# Altium PCB 16Ch_Milti_INA219.PcbDoc
Units mil, origin at the board's own origin, x right, y up, seen from the top; angles counter-clockwise.
Board outline 2153.54 x 7365 mil, 2 copper layers (Top Layer, Bottom Layer); 84 components, 68 nets, 338 pads, 58 vias.
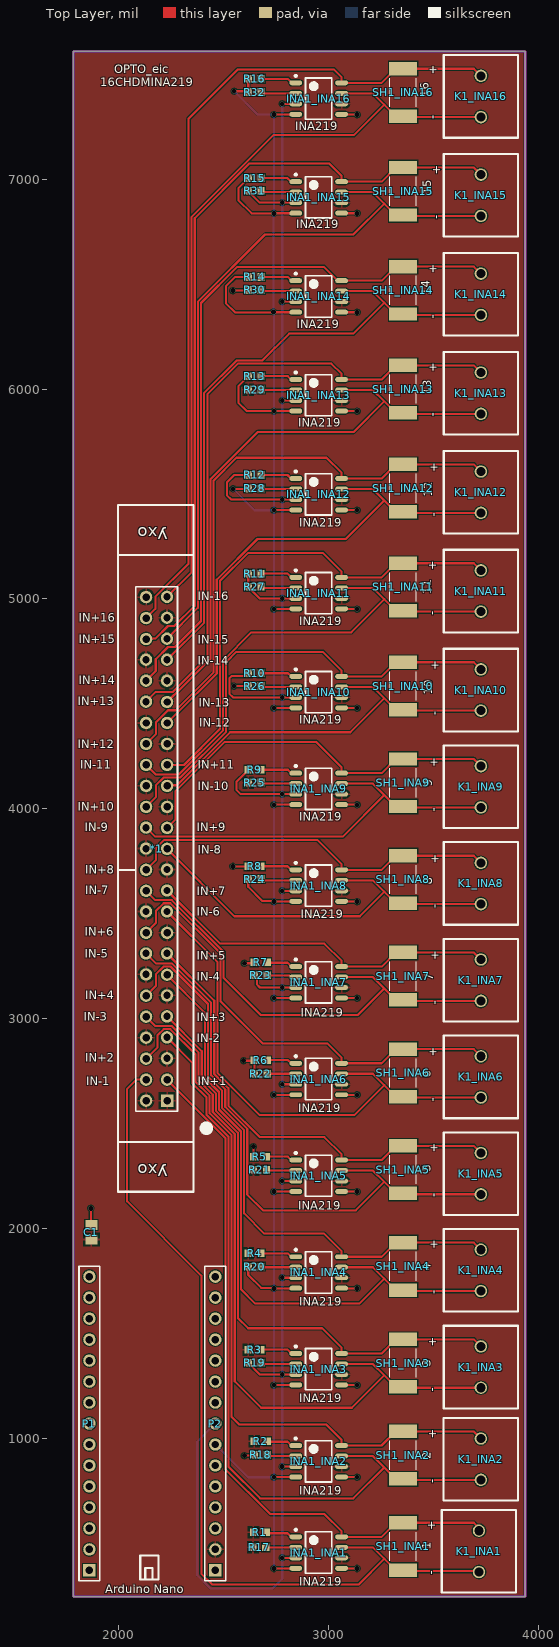
[diagram p0: Top Layer view]
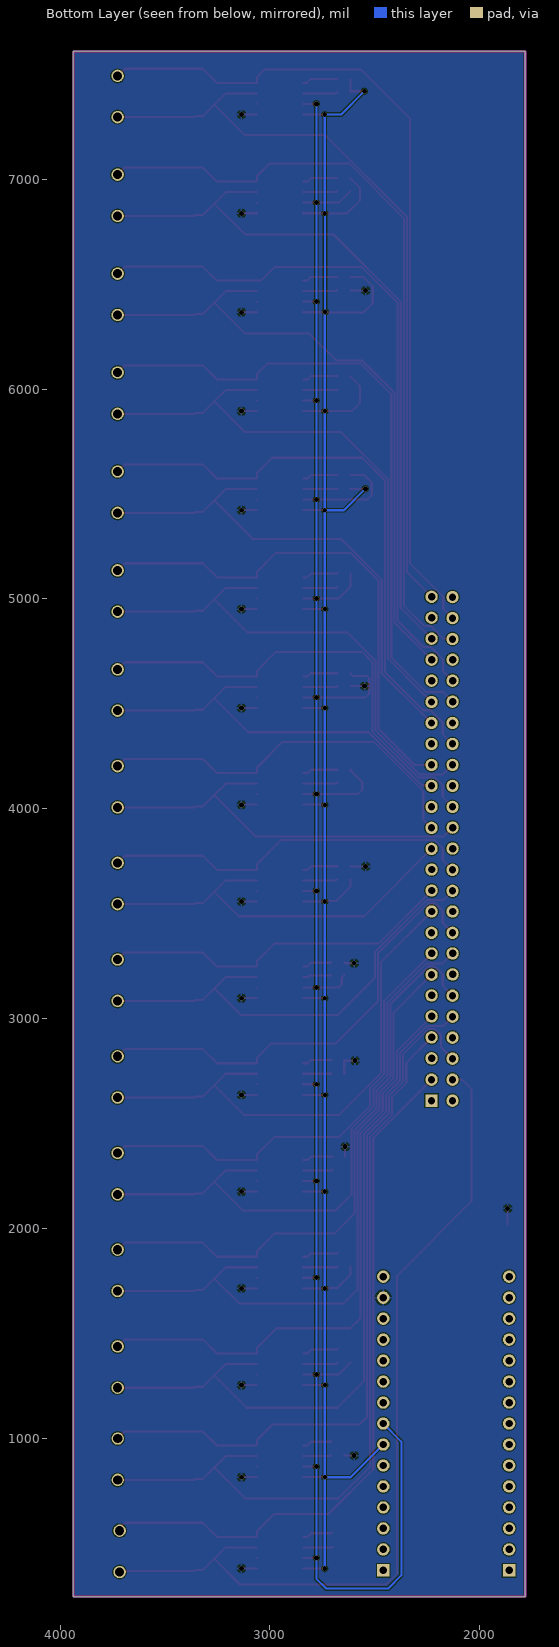
[diagram p1: Bottom Layer view, seen from below]
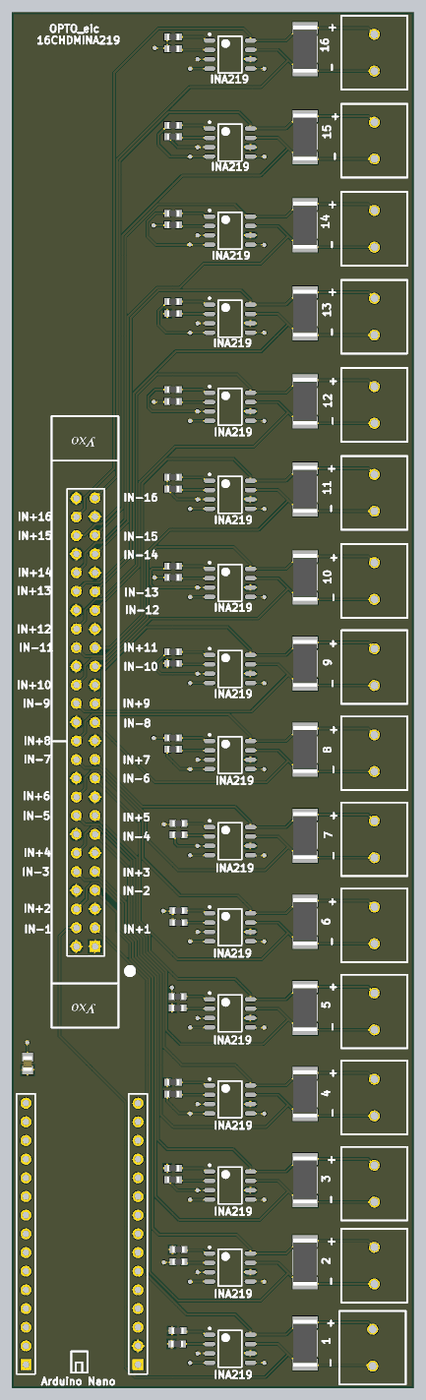
[diagram p2: 3D render of the assembled board from above, using the file's embedded part models]

## Layer stack, top to bottom
Top Solder: solder mask 0.4, Solder Resist, Dk 3.5
Top Layer: signal copper 1.4
Dielectric 1: dielectric 12.6, FR-4, Dk 4.8
Bottom Layer: signal copper 1.4
Bottom Solder: solder mask 0.4, Solder Resist, Dk 3.5

## Board outline
1783.46,245 1783.46,7610 3937.01,7610 3937.01,245

## Design rules (kind name [scope] priority, off if disabled: settings)
BoardOutlineClearance [OnLayer('Multi-Layer')] p1: gap=10 ignorepadtopadclearanceinfootprint=FALSE except(0: Arc-SplitContinuation Track-SplitContinuation SMDPad-SplitContinuation THPad-SplitContinuation Via-SplitContinuation Fill-SplitContinuation Poly-SplitContinuation Region-SplitContinuation Text-SplitContinuation; 15.75: Arc-OutlineEdge Track-OutlineEdge SMDPad-OutlineEdge THPad-OutlineEdge Via-OutlineEdge Fill-OutlineEdge Poly-OutlineEdge Region-OutlineEdge Text-OutlineEdge)
Clearance [All] p1: gap=4.92 ignorepadtopadclearanceinfootprint=TRUE
DiffPairsRouting [All] p1: maxlimit=10 minlimit=5 mostfreqgap=5.12 toplayer_minwidth=5 toplayer_maxwidth=15 toplayer_prefwidth=14.57 bottomlayer_minwidth=5 bottomlayer_maxwidth=15 bottomlayer_prefwidth=14.57 maxuncoupledlength=500
HoleSize [All] p1: absolutevalues=TRUE maxlimit=196.85 minlimit=11.81 maxpercent=80.000 minpercent=20.000
MinimumSolderMaskSliver [All] p1: minsoldermaskwidth=3.94
PlaneClearance [All] p1: clearance=39.37
PolygonConnect [All] p1: connectstyle=Relief reliefconductorwidth=10 reliefentries=4 polygonreliefangle="90 Angle" airgapwidth=10
RoomDefinition INA1 [InComponentClass('INA1')] p1 off: confinementstyle=ConfineIn formatcopy=TRUE lockcomponents=FALSE outline 2661,251.97 3908.75,251.97 3908.75,669.29 2661,669.29
RoomDefinition INA10 [InComponentClass('INA10')] p2 off: confinementstyle=ConfineIn formatcopy=TRUE lockcomponents=FALSE outline 2661,4363 3908.75,4363 3908.75,4768 2661,4768
RoomDefinition INA3 [InComponentClass('INA3')] p3 off: confinementstyle=ConfineIn formatcopy=TRUE lockcomponents=FALSE outline 2661,1136 3908.75,1136 3908.75,1541 2661,1541
RoomDefinition INA6 [InComponentClass('INA6')] p4 off: confinementstyle=ConfineIn formatcopy=TRUE lockcomponents=FALSE outline 2661,2519 3908.75,2519 3908.75,2924 2661,2924
RoomDefinition INA11 [InComponentClass('INA11')] p5 off: confinementstyle=ConfineIn formatcopy=TRUE lockcomponents=FALSE outline 2661,4835 3908.75,4835 3908.75,5240 2661,5240
RoomDefinition INA9 [InComponentClass('INA9')] p6 off: confinementstyle=ConfineIn formatcopy=TRUE lockcomponents=FALSE outline 2661,3902 3908.75,3902 3908.75,4307 2661,4307
RoomDefinition INA13 [InComponentClass('INA13')] p7 off: confinementstyle=ConfineIn formatcopy=TRUE lockcomponents=FALSE outline 2661,5778 3908.75,5778 3908.75,6183 2661,6183
RoomDefinition INA16 [InComponentClass('INA16')] p8 off: confinementstyle=ConfineIn formatcopy=TRUE lockcomponents=FALSE outline 2661,7192 3908.75,7192 3908.75,7597 2661,7597
RoomDefinition INA15 [InComponentClass('INA15')] p9 off: confinementstyle=ConfineIn formatcopy=TRUE lockcomponents=FALSE outline 2661,6721 3908.75,6721 3908.75,7126 2661,7126
RoomDefinition INA14 [InComponentClass('INA14')] p10 off: confinementstyle=ConfineIn formatcopy=TRUE lockcomponents=FALSE outline 2661,6249 3908.75,6249 3908.75,6654 2661,6654
RoomDefinition INA12 [InComponentClass('INA12')] p11 off: confinementstyle=ConfineIn formatcopy=TRUE lockcomponents=FALSE outline 2661,5306 3908.75,5306 3908.75,5711 2661,5711
RoomDefinition INA8 [InComponentClass('INA8')] p12 off: confinementstyle=ConfineIn formatcopy=TRUE lockcomponents=FALSE outline 2661,3441 3908.75,3441 3908.75,3846 2661,3846
RoomDefinition INA7 [InComponentClass('INA7')] p13 off: confinementstyle=ConfineIn formatcopy=TRUE lockcomponents=FALSE outline 2661,2980 3908.75,2980 3908.75,3385 2661,3385
RoomDefinition INA5 [InComponentClass('INA5')] p14 off: confinementstyle=ConfineIn formatcopy=TRUE lockcomponents=FALSE outline 2661,2058 3908.75,2058 3908.75,2463 2661,2463
RoomDefinition INA4 [InComponentClass('INA4')] p15 off: confinementstyle=ConfineIn formatcopy=TRUE lockcomponents=FALSE outline 2661,1597 3908.75,1597 3908.75,2002 2661,2002
RoomDefinition INA2 [InComponentClass('INA2')] p16 off: confinementstyle=ConfineIn formatcopy=TRUE lockcomponents=FALSE outline 2660.75,697 3908.5,697 3908.5,1102 2660.75,1102
RoutingVias [All] p1: holewidth=11.81 width=50 viastyle="Through Hole" minholewidth=11.81 minwidth=23.62 maxholewidth=28 maxwidth=50
SilkToSilkClearance [All] p1: silktosilkclearance=0
SilkToSolderMaskClearance [IsPad] p1: minsilkscreentomaskgap=0 clearancetoexposedcopper=TRUE
SolderMaskExpansion [All] p1: expansion=4 istentingtop=FALSE
UnRoutedNet [All] p1: checkbadconnections=TRUE
Width [All] p1: maxlimit=98.43 minlimit=4.92 preferedwidth=10 minimp=50.000000 maximp=50.000000 favimp=50.000000
23 further rules are at their usual default settings.

## Classes and differential pairs
channel class INA219-surrounding: INA1 INA2 INA3 INA4 INA5 INA6 INA7 INA8 INA9 INA10 INA11 INA12 INA13 INA14 INA15 INA16
component class INA16: INA1_INA16 K1_INA16 SH1_INA16
component class INA15: INA1_INA15 K1_INA15 SH1_INA15
component class INA14: INA1_INA14 K1_INA14 SH1_INA14
component class INA13: INA1_INA13 K1_INA13 SH1_INA13
component class INA12: INA1_INA12 K1_INA12 SH1_INA12
component class INA11: INA1_INA11 K1_INA11 SH1_INA11
component class INA10: INA1_INA10 K1_INA10 SH1_INA10
component class INA9: INA1_INA9 K1_INA9 SH1_INA9
component class INA8: INA1_INA8 K1_INA8 SH1_INA8
component class INA7: INA1_INA7 K1_INA7 SH1_INA7
component class INA6: INA1_INA6 K1_INA6 SH1_INA6
component class INA5: INA1_INA5 K1_INA5 SH1_INA5
component class INA4: INA1_INA4 K1_INA4 SH1_INA4
component class INA3: INA1_INA3 K1_INA3 SH1_INA3
component class INA2: INA1_INA2 K1_INA2 SH1_INA2
component class INA1: INA1_INA1 K1_INA1 SH1_INA1
net class IN+[1..16]: IN+1 IN+2 IN+3 IN+4 IN+5 IN+6 IN+7 IN+8 IN+9 IN+10 IN+11 IN+12 IN+13 IN+14 IN+15 IN+16
net class IN-[1..16]: IN-1 IN-2 IN-3 IN-4 IN-5 IN-6 IN-7 IN-8 IN-9 IN-10 IN-11 IN-12 IN-13 IN-14 IN-15 IN-16
net class A1[1..16]: A11 A12 A13 A14 A15 A16 A17 A18 A19 A110 A111 A112 A113 A114 A115 A116
net class A0[1..16]: A01 A02 A03 A04 A05 A06 A07 A08 A09 A010 A011 A012 A013 A014 A015 A016
component class 16Ch_Milti_INA219: *1 P2 q R1 R2 R3 R4 R5 R6 R7 R8 R9 R10 R11 R12 R13 R14 R15 R16 R17 R18 R19 R20 R21 R22 R23 R24 R25 R26 R27 R28 R29 R30 R31 R32 С1

## Components (designator, comment, footprint, x,y, rotation, side; value= is the part's Value field where it differs from the comment)
*1 "IDC50" IDC50 2206.56,3960.37 r90 top locked
INA1_INA1 "INA219" INA219 2952.75,455 r0 top (schematic designator INA1)
INA1_INA2 "INA219" INA219 2952.5,890 r0 top (schematic designator INA1)
INA1_INA3 "INA219" INA219 2952.75,1329 r0 top (schematic designator INA1)
INA1_INA4 "INA219" INA219 2952.75,1790 r0 top (schematic designator INA1)
INA1_INA5 "INA219" INA219 2952.75,2251 r0 top (schematic designator INA1)
INA1_INA6 "INA219" INA219 2952.75,2712 r0 top (schematic designator INA1)
INA1_INA7 "INA219" INA219 2952.75,3173 r0 top (schematic designator INA1)
INA1_INA8 "INA219" INA219 2952.75,3634 r0 top (schematic designator INA1)
INA1_INA9 "INA219" INA219 2952.75,4095 r0 top (schematic designator INA1)
INA1_INA10 "INA219" INA219 2952.75,4556 r0 top (schematic designator INA1)
INA1_INA11 "INA219" INA219 2952.75,5028 r0 top (schematic designator INA1)
INA1_INA12 "INA219" INA219 2952.75,5499 r0 top (schematic designator INA1)
INA1_INA13 "INA219" INA219 2952.75,5971 r0 top (schematic designator INA1)
INA1_INA14 "INA219" INA219 2952.75,6442 r0 top (schematic designator INA1)
INA1_INA15 "INA219" INA219 2952.75,6914 r0 top (schematic designator INA1)
INA1_INA16 "INA219" INA219 2952.75,7385 r0 top (schematic designator INA1)
K1_INA1 "KLEMMNIK-2" KLEMMNIK-2 3716.54,460.63 r270 top (schematic designator K1)
K1_INA2 "KLEMMNIK-2" KLEMMNIK-2 3725.5,900 r270 top (schematic designator K1)
K1_INA3 "KLEMMNIK-2" KLEMMNIK-2 3725.75,1339 r270 top (schematic designator K1)
K1_INA4 "KLEMMNIK-2" KLEMMNIK-2 3725.75,1800 r270 top (schematic designator K1)
K1_INA5 "KLEMMNIK-2" KLEMMNIK-2 3725.75,2261 r270 top (schematic designator K1)
K1_INA6 "KLEMMNIK-2" KLEMMNIK-2 3725.75,2722 r270 top (schematic designator K1)
K1_INA7 "KLEMMNIK-2" KLEMMNIK-2 3725.75,3183 r270 top (schematic designator K1)
K1_INA8 "KLEMMNIK-2" KLEMMNIK-2 3725.75,3644 r270 top (schematic designator K1)
K1_INA9 "KLEMMNIK-2" KLEMMNIK-2 3725.75,4105 r270 top (schematic designator K1)
K1_INA10 "KLEMMNIK-2" KLEMMNIK-2 3725.75,4566 r270 top (schematic designator K1)
K1_INA11 "KLEMMNIK-2" KLEMMNIK-2 3725.75,5038 r270 top (schematic designator K1)
K1_INA12 "KLEMMNIK-2" KLEMMNIK-2 3725.75,5509 r270 top (schematic designator K1)
K1_INA13 "KLEMMNIK-2" KLEMMNIK-2 3725.75,5981 r270 top (schematic designator K1)
K1_INA14 "KLEMMNIK-2" KLEMMNIK-2 3725.75,6452 r270 top (schematic designator K1)
K1_INA15 "KLEMMNIK-2" KLEMMNIK-2 3725.75,6924 r270 top (schematic designator K1)
K1_INA16 "KLEMMNIK-2" KLEMMNIK-2 3725.75,7395 r270 top (schematic designator K1)
P1 "Header 15" HDR1X15 1860,370 r90 top
P2 "Header 15" HDR1X15 2460,370 r90 top
R1 "RES0603" RES0603 2459.75,444.2 r180 top
R2 "RES0603" RES0603 2463.83,878.7 r180 top
R3 "RES0603" RES0603 2435.02,1315.01 r180 top
R4 "RES0603" RES0603 2435.02,1774.01 r180 top
R5 "RES0603" RES0603 2459.9,2234.5 r180 top
R6 "RES0603" RES0603 2463.83,2693.87 r180 top
R7 "RES0603" RES0603 2463.83,3161.24 r180 top
R8 "RES0603" RES0603 2435.02,3619.01 r180 top
R9 "RES0603" RES0603 2435.02,4079.01 r180 top
R10 "RES0603" RES0603 2435.02,4539.01 r180 top
R11 "RES0603" RES0603 2435.02,5014.01 r180 top
R12 "RES0603" RES0603 2435.02,5484.01 r180 top
R13 "RES0603" RES0603 2435.02,5955.01 r180 top
R14 "RES0603" RES0603 2435.02,6428.01 r180 top
R15 "RES0603" RES0603 2435.02,6899.01 r180 top
R16 "RES0603" RES0603 2435.02,7372.01 r180 top
R17 "RES0603" RES0603 2457.39,373.33 r180 top
R18 "RES0603" RES0603 2463.83,813.7 r180 top
R19 "RES0603" RES0603 2435.02,1253.01 r180 top
R20 "RES0603" RES0603 2435.02,1711.01 r180 top
R21 "RES0603" RES0603 2459.9,2172.5 r180 top
R22 "RES0603" RES0603 2463.83,2629.87 r180 top
R23 "RES0603" RES0603 2463.83,3100.24 r180 top
R24 "RES0603" RES0603 2435.02,3558.01 r180 top
R25 "RES0603" RES0603 2435.02,4018.01 r180 top
R26 "RES0603" RES0603 2435.02,4478.01 r180 top
R27 "RES0603" RES0603 2435.02,4951.01 r180 top
R28 "RES0603" RES0603 2435.02,5420.01 r180 top
R29 "RES0603" RES0603 2435.02,5891.01 r180 top
R30 "RES0603" RES0603 2435.02,6366.01 r180 top
R31 "RES0603" RES0603 2435.02,6838.01 r180 top
R32 "RES0603" RES0603 2435.02,7309.01 r180 top
SH1_INA1 "RES2512" RES2512 3354.75,474 r270 top (schematic designator SH1)
SH1_INA2 "RES2512" RES2512 3354.5,909 r270 top (schematic designator SH1)
SH1_INA3 "RES2512" RES2512 3354.75,1348 r270 top (schematic designator SH1)
SH1_INA4 "RES2512" RES2512 3354.75,1809 r270 top (schematic designator SH1)
SH1_INA5 "RES2512" RES2512 3354.75,2270 r270 top (schematic designator SH1)
SH1_INA6 "RES2512" RES2512 3354.75,2731 r270 top (schematic designator SH1)
SH1_INA7 "RES2512" RES2512 3354.75,3192 r270 top (schematic designator SH1)
SH1_INA8 "RES2512" RES2512 3354.75,3653 r270 top (schematic designator SH1)
SH1_INA9 "RES2512" RES2512 3354.75,4114 r270 top (schematic designator SH1)
SH1_INA10 "RES2512" RES2512 3354.75,4575 r270 top (schematic designator SH1)
SH1_INA11 "RES2512" RES2512 3354.75,5047 r270 top (schematic designator SH1)
SH1_INA12 "RES2512" RES2512 3354.75,5518 r270 top (schematic designator SH1)
SH1_INA13 "RES2512" RES2512 3354.75,5990 r270 top (schematic designator SH1)
SH1_INA14 "RES2512" RES2512 3354.75,6461 r270 top (schematic designator SH1)
SH1_INA15 "RES2512" RES2512 3354.75,6933 r270 top (schematic designator SH1)
SH1_INA16 "RES2512" RES2512 3354.75,7404 r270 top (schematic designator SH1)
С1 "CAP0805" CAP0805 1870.08,1984.25 r90 top

## Footprints (in the part's own frame and the unit in brackets; to place one, negate y for a bottom-side part, rotate by r counter-clockwise, add the part's x,y. Pads: shape width x height; smd on the part's side, far side on the other; paste and mask are expansions set on the pad)
CAP0805 [mm]
  rect 1.16x1.47 smd: 1(-0.946,0.022) 2(0.814,0.022)
  body extent -1.07,-0.6 0.94,0.65, height 0.94
HDR1X15 [mm] "Connector; Header; 15 Position"
  rect 1.5x1.5 hole 0.9: 1(0,0)
  round 1.5 hole 0.9: 2(2.54,0) 3(5.08,0) 4(7.62,0) 5(10.16,0) 6(12.7,0) 7(15.24,0) 8(17.78,0) 9(20.32,0) 10(22.86,0) 11(25.4,0) 12(27.94,0) 13(30.48,0) 14(33.02,0) 15(35.56,0)
  silkscreen extent -1.27,-1.27 36.83,1.27
IDC50 [mm]
  rect 1.5x1.5 hole 0.9: 1(-34.325,-0.595)
  round 1.5 hole 0.9: 2(-34.325,1.945) 3(-31.785,-0.595) 4(-31.785,1.945) 5(-29.206,-0.588) 6(-29.245,1.945) 7(-26.666,-0.588) 8(-26.705,1.945) 9(-24.126,-0.588) 10(-24.165,1.945) 11(-21.586,-0.588) 12(-21.625,1.945) 13(-19.085,-0.595) 14(-19.046,1.952) 15(-16.506,-0.588) 16(-16.506,1.952) 17(-14.005,-0.595) 18(-14.005,1.945) 19(-11.426,-0.588) 20(-11.426,1.952) 21(-8.886,-0.588) 22(-8.925,1.945) 23(-6.346,-0.588) 24(-6.385,1.945) 25(-3.845,-0.595) 26(-3.806,1.952) 27(-1.305,-0.595) 28(-1.266,1.952) 29(1.235,-0.595) 30(1.235,1.945) 31(3.775,-0.595) 32(3.775,1.945) 33(6.315,-0.595) 34(6.315,1.945) 35(8.855,-0.595) 36(8.855,1.945) 37(11.395,-0.595) 38(11.395,1.945) 39(13.935,-0.595) 40(13.974,1.952) 41(16.514,-0.588) 42(16.514,1.952) 43(19.054,-0.588) 44(19.054,1.952) 45(21.594,-0.588) 46(21.555,1.945) 47(24.134,-0.588) 48(24.095,1.945) 49(26.674,-0.588) 50(26.635,1.945)
  silkscreen extent -45.35,-5.73 37.78,5.33
INA219 [mm] "SOIC, 8-Leads, Body 4,88x3,91mm, Pitch 1,27mm, IPC Medium Density"
  oval 1.55x0.6 smd: 1(-2.775,1.905) 2(-2.775,0.635) 3(-2.775,-0.635) 4(-2.775,-1.905) 5(2.775,-1.905) 6(2.775,-0.635) 7(2.775,0.635) 8(2.775,1.905)
  silkscreen extent -2.9,-2.5 1.6,2.88, body extent -2,-2.5 2,2.5, height 3.18
KLEMMNIK-2 [mm]
  round 1.5 hole 1.1: 1(-2.5,0) 2(2.5,0)
  silkscreen extent -5,-4.5 5,4.5
RES0603 [mm]
  rect 0.87x0.93 smd paste+0 mask+0.102: 1(-6.182,-2.717) 2(-4.622,-2.717)
  body extent -6.2,-3.12 -4.6,-2.32, height 0.55
RES2512 [mm]
  rect 1.62x3.4 smd: 1(-3.132,0.004) 2(2.614,0.004)
  silkscreen extent -2,-1.59 1.48,1.59, body extent -3.43,-1.6 2.92,1.6, height 0.65

## Part data
P1 P2: "Header, 15-Pin", LatestRevisionDate=17-Jul-2002, LatestRevisionNote="Re-released for DXP Platform.", Publisher="Altium Limited"

## Via types
v1: diameter 23.62, hole 23.62, Top Layer to Bottom Layer, 58 vias

## Nets (pads, with @x,y where several pads share a name; then routed paths per layer and width w, separated by ;. In a path a pad name is that pad's centre, name@x,y a point inside that pad or via, vN(x,y) a via of type N, cw(c..) or ccw(c..) an arc to the next point about the centre after c; other vN are vias at no path point)
3V: INA1_INA1.5 INA1_INA2.5 INA1_INA3.5 INA1_INA4.5 INA1_INA5.5 INA1_INA6.5 INA1_INA7.5 INA1_INA8.5 INA1_INA9.5 INA1_INA10.5 INA1_INA11.5 INA1_INA12.5 INA1_INA13.5 INA1_INA14.5 INA1_INA15.5 INA1_INA16.5 P2.14 R5.2 R6.2 R7.2 R8.2 R18.2 R22.2 R26.2 R30.2 С1.2 | length 1749
  Top Layer w10: v1(1867.08,2095.25) 1867.08,2018.45 С1.2 ; v1(2544,3725) 2616,3725 R8.2 ; v1(2544,6470) 2614,6470 R30.2 ; v1(2548.5,4585) R26.2 ; v1(2594.49,2799.21) 2644.17,2799.21 R6.2 R22.2 ; v1(2598.43,917.32) 2642.45,917.32 R18.2 ; v1(2598.43,3263.78) 2641.37,3263.78 R7.2 ; v1(2641.73,2389.76) 2641.73,2341.62 R5.2 ; INA1_INA2.5 3062.25,814.5 3135.25,814.5 v1(3135.75,814) ; INA1_INA1.5 3062.5,379.5 3135.5,379.5 v1(3136,379) ; INA1_INA3.5 3062.5,1253.5 3135.5,1253.5 v1(3136,1253) ; INA1_INA4.5 3062.5,1714.5 3135.5,1714.5 v1(3136,1714) ; INA1_INA5.5 3062.5,2175.5 3135.5,2175.5 v1(3136,2175) ; INA1_INA6.5 3062.5,2636.5 3135.5,2636.5 v1(3136,2636) ; INA1_INA7.5 3062.5,3097.5 3135.5,3097.5 v1(3136,3097) ; INA1_INA8.5 3062.5,3558.5 3135.5,3558.5 v1(3136,3558) ; INA1_INA9.5 3062.5,4019.5 3135.5,4019.5 v1(3136,4019) ; INA1_INA10.5 3062.5,4480.5 3135.5,4480.5 v1(3136,4480) ; INA1_INA11.5 3062.5,4952.5 3135.5,4952.5 v1(3136,4952) ; INA1_INA12.5 3062.5,5423.5 3135.5,5423.5 v1(3136,5423) ; INA1_INA13.5 3062.5,5895.5 3135.5,5895.5 v1(3136,5895) ; INA1_INA14.5 3062.5,6366.5 3135.5,6366.5 v1(3136,6366) ; INA1_INA15.5 3062.5,6838.5 3135.5,6838.5 v1(3136,6838) ; INA1_INA16.5 3062.5,7309.5 3135.5,7309.5 v1(3136,7309)
A01: INA1_INA1.2 R17.1 | length 143
  Top Layer w10: R17.1 2700.79,480 INA1_INA1.2
A02: INA1_INA2.2 R18.1 | length 138.4
  Top Layer w10: R18.1 2712.91,915 INA1_INA2.2
A03: INA1_INA3.2 R19.1 | length 167.6
  Top Layer w10: R19.1 2684.42,1354 INA1_INA3.2
A04: INA1_INA4.2 R20.1 | length 166.3
  Top Layer w10: R20.1 2681.42,1815 INA1_INA4.2
A05: INA1_INA5.2 R21.1 | length 141.6
  Top Layer w10: R21.1 2706.77,2276 INA1_INA5.2
A06: INA1_INA6.2 R22.1 | length 136.4
  Top Layer w10: R22.1 2707.23,2737 INA1_INA6.2
A07: INA1_INA7.2 R23.1 | length 140.1
  Top Layer w10: R23.1 2709.45,3205 2814.11,3205 2821.11,3198 INA1_INA7.2
A08: INA1_INA8.2 R24.1 | length 167.6
  Top Layer w10: R24.1 2684.42,3659 INA1_INA8.2
A09: INA1_INA9.2 R25.1 | length 167.1
  Top Layer w10: R25.1 2683.42,4120 INA1_INA9.2
A010: INA1_INA10.2 R26.1 | length 166.7
  Top Layer w10: R26.1 2682.42,4581 INA1_INA10.2
A11: INA1_INA1.1 R1.1 | length 149.1
  Top Layer w10: R1.1 2707.33,547 2804.11,547 2821.11,530 INA1_INA1.1
A011: INA1_INA11.2 R27.1 | length 167.1
  Top Layer w10: R27.1 2683.42,5053 INA1_INA11.2
A12: INA1_INA2.1 R2.1 | length 144.6
  Top Layer w10: R2.1 2709.91,983 2804.63,983 2822.63,965 INA1_INA2.1
A012: INA1_INA12.2 R28.1 | length 166.3
  Top Layer w10: R28.1 2681.42,5524 INA1_INA12.2
A13: INA1_INA3.1 R3.1 | length 172.5
  Top Layer w10: R3.1 2804.88,1422 2822.88,1404 INA1_INA3.1
A013: INA1_INA13.2 R29.1 | length 165.9
  Top Layer w10: R29.1 2680.42,5996 INA1_INA13.2
A14: INA1_INA4.1 R4.1 | length 171.7
  Top Layer w10: R4.1 2805.11,1881 2821.11,1865 INA1_INA4.1
A014: INA1_INA14.2 R30.1 | length 167.6
  Top Layer w10: R30.1 2684.42,6467 INA1_INA14.2
A15: INA1_INA5.1 R5.1 | length 147.4
  Top Layer w10: R5.1 2703.29,2342 2805.11,2342 2821.11,2326 INA1_INA5.1
A015: INA1_INA15.2 R31.1 | length 167.6
  Top Layer w10: R31.1 2684.42,6939 INA1_INA15.2
A16: INA1_INA6.1 R6.1 | length 143.6
  Top Layer w10: R6.1 2707.23,2802 2806.11,2802 2821.11,2787 INA1_INA6.1
A016: INA1_INA16.2 R32.1 | length 167.6
  Top Layer w10: R32.1 2684.42,7410 INA1_INA16.2
A17: INA1_INA7.1 R7.1 | length 144.6
  Top Layer w10: R7.1 2709.45,3266 2804.88,3266 2822.88,3248 INA1_INA7.1
A18: INA1_INA8.1 R8.1 | length 172.1
  Top Layer w10: R8.1 2804.11,3726 2821.11,3709 INA1_INA8.1
A19: INA1_INA9.1 R9.1 | length 171.7
  Top Layer w10: R9.1 2805.11,4186 2821.11,4170 INA1_INA9.1
A110: INA1_INA10.1 R10.1 | length 171.3
  Top Layer w10: R10.1 2806.11,4646 2821.11,4631 INA1_INA10.1
A111: INA1_INA11.1 R11.1 | length 172.5
  Top Layer w10: R11.1 2804.88,5121 2822.88,5103 INA1_INA11.1
A112: INA1_INA12.1 R12.1 | length 172.1
  Top Layer w10: R12.1 2804.11,5591 2821.11,5574 INA1_INA12.1
A113: INA1_INA13.1 R13.1 | length 171.7
  Top Layer w10: R13.1 2805.11,6062 2821.11,6046 INA1_INA13.1
A114: INA1_INA14.1 R14.1 | length 172.5
  Top Layer w10: R14.1 2804.88,6535 2822.88,6517 INA1_INA14.1
A115: INA1_INA15.1 R15.1 | length 172.1
  Top Layer w10: R15.1 2804.11,7006 2821.11,6989 INA1_INA15.1
A116: INA1_INA16.1 R16.1 | length 172.9
  Top Layer w10: R16.1 2805.8,7479 2824.8,7460 INA1_INA16.1
GNDArd: *1.1 *1.2 *1.5 *1.8 *1.11 *1.14 *1.17 *1.20 *1.23 *1.26 *1.29 *1.32 *1.35 *1.38 *1.41 *1.44 *1.47 *1.50 INA1_INA1.6 INA1_INA2.6 INA1_INA3.6 INA1_INA4.6 INA1_INA5.6 INA1_INA6.6 INA1_INA7.6 INA1_INA8.6 INA1_INA9.6 INA1_INA10.6 INA1_INA11.6 INA1_INA12.6 INA1_INA13.6 INA1_INA14.6 INA1_INA15.6 INA1_INA16.6 P2.2 R1.2 R2.2 R3.2 R4.2 R17.2 R21.2 R25.2 R29.2 С1.1 | length 11.3
  Top Layer w10: INA1_INA2.6 INA1_INA2.6@3062.25,864.5 ; INA1_INA1.6 INA1_INA1.6@3062.5,429.5 ; INA1_INA3.6 INA1_INA3.6@3062.5,1303.5 ; INA1_INA4.6 INA1_INA4.6@3062.5,1764.5 ; INA1_INA5.6 INA1_INA5.6@3062.5,2225.5 ; INA1_INA6.6 INA1_INA6.6@3062.5,2686.5 ; INA1_INA7.6 INA1_INA7.6@3062.5,3147.5 ; INA1_INA8.6 INA1_INA8.6@3062.5,3608.5 ; INA1_INA9.6 INA1_INA9.6@3062.5,4069.5 ; INA1_INA10.6 INA1_INA10.6@3062.5,4530.5 ; INA1_INA11.6 INA1_INA11.6@3062.5,5002.5 ; INA1_INA12.6 INA1_INA12.6@3062.5,5473.5 ; INA1_INA13.6 INA1_INA13.6@3062.5,5945.5 ; INA1_INA14.6 INA1_INA14.6@3062.5,6416.5 ; INA1_INA15.6 INA1_INA15.6@3062.5,6888.5 ; INA1_INA16.6 INA1_INA16.6@3062.5,7359.5
IN+1: *1.3 INA1_INA1.8 K1_INA1.1 SH1_INA1.1 | length 3381.6
  Top Layer w10: *1.3 2507.87,2431.13 2507.87,852.13 2721,639 2980,639 3062,557 INA1_INA1.8 3252.53,530 3319.86,597.32 SH1_INA1.1 3691.85,597.32 3691.85,597.02 3716.54,572.33 K1_INA1.1
IN+2: *1.6 INA1_INA2.8 K1_INA2.1 SH1_INA2.1 | length 3479.5
  Top Layer w10: *1.6 2185,2864 2185,2921.6 2213.36,2949.96 2246.04,2949.96 2365.55,2830.45 2365.55,2698.84 2432.84,2631.55 2432.84,2548.36 2537.72,2443.49 2537.72,1101.28 2573.68,1065.32 2988.24,1065.32 3061.75,991.81 INA1_INA2.8 3252.28,965 3319.61,1032.32 SH1_INA2.1 3691.6,1032.32 K1_INA2.1
IN+3: *1.9 INA1_INA3.8 K1_INA3.1 SH1_INA3.1 | length 2863.4
  Top Layer w10: *1.9 2395.39,2844.82 2395.39,2711.2 2462.69,2643.91 2462.69,2560.72 2567.56,2455.85 2567.56,1572.98 2616.54,1524 2969,1524 3062,1431 INA1_INA3.8 3252.53,1404 3319.86,1471.32 SH1_INA3.1 3691.85,1471.32 K1_INA3.1
IN+4: *1.12 INA1_INA4.8 K1_INA4.1 SH1_INA4.1 | length 2800.7
  Top Layer w10: *1.12 2176.52,3155.52 2176.52,3211.31 2213.66,3248.45 2246.34,3248.45 2425.24,3069.55 2425.24,2723.56 2492.53,2656.27 2492.53,2573.08 2597.4,2468.21 2597.4,2071.41 2693.81,1975 2978.81,1975 3062,1891.81 INA1_INA4.8 3252.53,1865 3319.86,1932.32 SH1_INA4.1 3691.85,1932.32 K1_INA4.1
IN+5: *1.15 INA1_INA5.8 K1_INA5.1 SH1_INA5.1 | length 2214.9
  Top Layer w10: *1.15 2455.08,3085.14 2455.08,2735.92 2522.37,2668.63 2522.37,2585.44 2672.82,2435 2980,2435 3062,2353 INA1_INA5.8 3252.53,2326 3319.86,2393.32 SH1_INA5.1 3691.85,2393.32 K1_INA5.1
IN+6: *1.18 INA1_INA6.8 K1_INA6.1 SH1_INA6.1 | length 2195.6
  Top Layer w10: *1.18 2176.37,3455.37 2176.37,3512.98 2213.36,3549.96 2246.04,3549.96 2484.92,3311.08 2484.92,3082.24 2685.17,2882 2993.81,2882 3062,2813.81 INA1_INA6.8 3252.53,2787 3319.86,2854.32 SH1_INA6.1 3691.85,2854.32 K1_INA6.1
IN+7: *1.21 INA1_INA7.8 K1_INA7.1 SH1_INA7.1 | length 1704
  Top Layer w10: *1.21 2483.21,3357 2980,3357 3062,3275 INA1_INA7.8 3252.53,3248 3319.86,3315.32 SH1_INA7.1 3691.85,3315.32 K1_INA7.1
IN+8: *1.24 INA1_INA8.8 K1_INA8.1 SH1_INA8.1 | length 1804.6
  Top Layer w10: *1.24 2176.52,3755.52 2176.52,3811.31 2217.29,3852.08 2945.73,3852.08 3062,3735.81 INA1_INA8.8 3252.53,3709 3319.86,3776.32 SH1_INA8.1 3691.85,3776.32 K1_INA8.1
IN+9: *1.27 INA1_INA9.8 K1_INA9.1 SH1_INA9.1 | length 1863.9
  Top Layer w10: *1.27 2269.45,3948.45 2269.45,4083.04 2505.41,4319 2940,4319 3062,4197 INA1_INA9.8 3252.53,4170 3319.86,4237.32 SH1_INA9.1 3691.85,4237.32 K1_INA9.1
IN+10: *1.30 INA1_INA10.8 K1_INA10.1 SH1_INA10.1 | length 2235.3
  Top Layer w10: *1.30 2176.52,4055.52 2176.52,4111.31 2214.29,4149.08 2293.28,4149.08 2511.84,4367.64 2511.84,4699.84 2560,4748 2972,4748 3062,4658 INA1_INA10.8 3252.53,4631 3319.86,4698.32 SH1_INA10.1 3691.85,4698.32 K1_INA10.1
IN+11: *1.33 INA1_INA11.8 K1_INA11.1 SH1_INA11.1 | length 2434.1
  Top Layer w10: *1.33 2311,4209 2482,4380 2482,5085.9 2616.1,5220 2971.81,5220 3062,5129.81 INA1_INA11.8 3252.53,5103 3319.86,5170.32 SH1_INA11.1 3691.85,5170.32 K1_INA11.1
IN+12: *1.36 INA1_INA12.8 K1_INA12.1 SH1_INA12.1 | length 2827.4
  Top Layer w10: *1.36 2176.52,4355.52 2176.52,4411.31 2234.76,4469.55 2270.55,4469.55 2451.92,4650.92 2451.92,5564.82 2560.1,5673 2989.81,5673 3062,5600.81 INA1_INA12.8 3252.53,5574 3319.86,5641.32 SH1_INA12.1 3691.85,5641.32 K1_INA12.1
IN+13: *1.40 INA1_INA13.8 K1_INA13.1 SH1_INA13.1 | length 3088
  Top Layer w10: *1.40 2176.22,4557.04 2258.04,4557.04 2422,4721 2422,5976.36 2567.64,6122 3012.81,6122 3062,6072.81 INA1_INA13.8 3252.53,6046 3319.86,6113.32 SH1_INA13.1 3691.85,6113.32 K1_INA13.1
IN+14: *1.42 INA1_INA14.8 K1_INA14.1 SH1_INA14.1 | length 3403
  Top Layer w10: *1.42 2176.22,4657.04 2176.22,4712.83 2234.46,4771.07 2268.07,4771.07 2391.76,4894.76 2391.76,6410.66 2564.1,6583 2977.3,6583 3043.3,6517 INA1_INA14.8 3252.53,6517 3319.86,6584.32 SH1_INA14.1 3691.85,6584.32 K1_INA14.1
IN+15: *1.46 INA1_INA15.8 K1_INA15.1 SH1_INA15.1 | length 3710.4
  Top Layer w10: *1.46 2132.13,4811.13 2174.53,4811.13 2234.46,4871.07 2265.07,4871.07 2361.92,4967.92 2361.92,6814.92 2623,7076 3001.81,7076 3062,7015.81 INA1_INA15.8 3252.53,6989 3319.86,7056.32 SH1_INA15.1 3691.85,7056.32 K1_INA15.1
IN+16: *1.48 INA1_INA16.8 K1_INA16.1 SH1_INA16.1 | length 4038.4
  Top Layer w10: *1.48 2174,4953 2174,5010.6 2332.08,5168.68 2332.08,7288.18 2567.9,7524 3024.81,7524 3062,7486.81 INA1_INA16.8 3252.53,7460 3319.86,7527.32 SH1_INA16.1 3691.85,7527.32 K1_INA16.1
IN-1: *1.4 INA1_INA1.7 K1_INA1.2 SH1_INA1.2 | length 4212.5
  Top Layer w10: *1.4 2084,2709 2040,2665 2040,2128.79 2393.7,1775.09 2393.7,354.33 2445.03,303 3142.86,303 3265.41,425.55 ; INA1_INA1.7 3210.96,480 3265.41,425.55 ; K1_INA1.2 3712.17,366.57 3359.43,366.57 SH1_INA1.2 3319.86,371.1 3265.41,425.55
IN-2: *1.7 INA1_INA2.7 K1_INA2.2 SH1_INA2.2 | length 3744.1
  Top Layer w10: *1.7@2230.02,2910.2 2350.63,2789.58 2350.63,2692.66 2417.92,2625.37 2417.92,2542.18 2522.8,2437.31 2522.8,864.2 2674,713 3117.61,713 3265.16,860.55 ; INA1_INA2.7 3210.71,915 3265.16,860.55 ; K1_INA2.2 3359.17,801.57 SH1_INA2.2 3319.61,806.1 3265.16,860.55
IN-3: *1.10 INA1_INA3.7 K1_INA3.2 SH1_INA3.2 | length 3498.3
  Top Layer w10: *1.10 2174.12,2964.88 2252.22,2964.88 2380.47,2836.63 2380.47,2705.02 2447.76,2637.73 2447.76,2554.54 2552.64,2449.67 2552.64,1271.39 2679.03,1145 3110.86,1145 3265.41,1299.55 ; INA1_INA3.7 3210.96,1354 3265.41,1299.55 ; K1_INA3.2 3359.43,1240.57 SH1_INA3.2 3319.86,1245.1 3265.41,1299.55
IN-4: *1.13 INA1_INA4.7 K1_INA4.2 SH1_INA4.2 | length 3115.5
  Top Layer w10: *1.13 2410.31,3028.69 2410.31,2717.38 2477.61,2650.09 2477.61,2566.9 2582.48,2462.03 2582.48,1709.26 2648.74,1643 3147.86,1643 3265.41,1760.55 ; INA1_INA4.7 3210.96,1815 3265.41,1760.55 ; K1_INA4.2 3359.43,1701.57 SH1_INA4.2 3319.86,1706.1 3265.41,1760.55
IN-5: *1.16 INA1_INA5.7 K1_INA5.2 SH1_INA5.2 | length 2844.7
  Top Layer w10: *1.16 2176.84,3263.37 2252.52,3263.37 2440.16,3075.73 2440.16,2729.74 2507.45,2662.45 2507.45,2579.26 2612.32,2474.39 2612.32,2161.07 2687.4,2086 3129.86,2086 3265.41,2221.55 ; INA1_INA5.7 3210.96,2276 3265.41,2221.55 ; K1_INA5.2 3359.43,2162.57 SH1_INA5.2 3319.86,2167.1 3265.41,2221.55
IN-6: *1.19 INA1_INA6.7 K1_INA6.2 SH1_INA6.2 | length 2516.8
  Top Layer w10: *1.19 2470,3270.21 2470,2742.1 2672.1,2540 3122.86,2540 3265.41,2682.55 ; INA1_INA6.7 3210.96,2737 3265.41,2682.55 ; K1_INA6.2 3359.43,2623.57 SH1_INA6.2 3319.86,2628.1 3265.41,2682.55
IN-7: *1.22 INA1_INA7.7 K1_INA7.2 SH1_INA7.2 | length 2216.4
  Top Layer w10: *1.22 2174.12,3564.88 2252.22,3564.88 2499.84,3317.26 2499.84,3193.23 2676.08,3017 3138.86,3017 3265.41,3143.55 ; INA1_INA7.7 3210.96,3198 3265.41,3143.55 ; K1_INA7.2 3359.43,3084.57 SH1_INA7.2 3319.86,3089.1 3265.41,3143.55
IN-8: *1.25 INA1_INA8.7 K1_INA8.2 SH1_INA8.2 | length 1927.4
  Top Layer w10: *1.25 2551.06,3487.94 3148.79,3487.94 3265.41,3604.55 ; INA1_INA8.7 3210.96,3659 3265.41,3604.55 ; K1_INA8.2 3359.43,3545.57 SH1_INA8.2 3319.86,3550.1 3265.41,3604.55
IN-9: *1.28 INA1_INA9.7 K1_INA9.2 SH1_INA9.2 | length 1946.7
  Top Layer w10: *1.28 2173.21,3867 3066.86,3867 3265.41,4065.55 ; INA1_INA9.7 3210.96,4120 3265.41,4065.55 ; K1_INA9.2 3359.43,4006.57 SH1_INA9.2 3319.86,4011.1 3265.41,4065.55
IN-10: *1.31 INA1_INA10.7 K1_INA10.2 SH1_INA10.2 | length 1919.1
  Top Layer w10: *1.31 2233.32,4112.32 2277.63,4112.32 2530.31,4365 3103.86,4365 3265.41,4526.55 ; INA1_INA10.7 3210.96,4581 3265.41,4526.55 ; K1_INA10.2 3359.43,4467.57 SH1_INA10.2 3319.86,4472.1 3265.41,4526.55
IN-11: *1.34 INA1_INA11.7 K1_INA11.2 SH1_INA11.2 | length 2405.1
  Top Layer w10: *1.34 2175,4164 2287.1,4164 2496.92,4373.82 2496.92,4706.02 2631.9,4841 3107.86,4841 3265.41,4998.55 ; INA1_INA11.7 3210.96,5053 3265.41,4998.55 ; K1_INA11.2 3359.43,4939.57 SH1_INA11.2 3319.86,4944.1 3265.41,4998.55
IN-12: *1.37 INA1_INA12.7 K1_INA12.2 SH1_INA12.2 | length 2447.3
  Top Layer w10: *1.37 2275.63,4454.63 2276.73,4454.63 2467,4644.9 2467,5092 2661,5286 3081.86,5286 3265.41,5469.55 ; INA1_INA12.7 3210.96,5524 3265.41,5469.55 ; K1_INA12.2 3359.43,5410.57 SH1_INA12.2 3319.86,5415.1 3265.41,5469.55
IN-13: *1.39 INA1_INA13.7 K1_INA13.2 SH1_INA13.2 | length 2841
  Top Layer w10: *1.39 2263.12,4542.12 2264.22,4542.12 2437,4714.9 2437,5571 2662,5796 3119.86,5796 3265.41,5941.55 ; INA1_INA13.7 3210.96,5996 3265.41,5941.55 ; K1_INA13.2 3359.43,5882.57 SH1_INA13.2 3319.86,5887.1 3265.41,5941.55
IN-14: *1.43 INA1_INA14.7 K1_INA14.2 SH1_INA14.2 | length 3092.7
  Top Layer w10: *1.43 2406.69,4887.5 2406.69,5982.15 2561.46,6136.92 2684.32,6136.92 2812.4,6265 3117.86,6265 3265.41,6412.55 ; INA1_INA14.7 3210.96,6467 3265.41,6412.55 ; K1_INA14.2 3359.43,6353.57 SH1_INA14.2 3319.86,6358.1 3265.41,6412.55
IN-15: *1.45 INA1_INA15.7 K1_INA15.2 SH1_INA15.2 | length 3460.3
  Top Layer w10: *1.45 2376.84,4957.66 2376.84,6416.84 2697,6737 3117.86,6737 3265.41,6884.55 ; INA1_INA15.7 3210.96,6939 3265.41,6884.55 ; K1_INA15.2 3359.43,6825.57 SH1_INA15.2 3319.86,6830.1 3265.41,6884.55
IN-16: *1.49 INA1_INA16.7 K1_INA16.2 SH1_INA16.2 | length 3709.7
  Top Layer w10: *1.49 2347,5127.81 2347,6821.1 2736.45,7210.55 3120.41,7210.55 3265.41,7355.55 ; INA1_INA16.7 3210.96,7410 3265.41,7355.55 ; K1_INA16.2 3359.43,7296.57 SH1_INA16.2 3319.86,7301.1 3265.41,7355.55
SCL: INA1_INA1.4 INA1_INA2.4 INA1_INA3.4 INA1_INA4.4 INA1_INA5.4 INA1_INA6.4 INA1_INA7.4 INA1_INA8.4 INA1_INA9.4 INA1_INA10.4 INA1_INA11.4 INA1_INA12.4 INA1_INA13.4 INA1_INA14.4 INA1_INA15.4 INA1_INA16.4 P2.7 R13.2 R14.2 R15.2 R16.2 R20.2 R24.2 R28.2 R32.2 | length 11111.3
  Top Layer w10: v1(2545,5525) 2616.18,5525 R28.2@2617,5525.82 ; v1(2550,7420) 2613,7420 R32.2 R16.2 ; R20.2 2617,1778 2678.39,1716.61 2736.39,1716.61 v1(2739,1714) 2739.5,1714.5 2843,1714.5 INA1_INA4.4 ; R24.2 2617,3628 2684.39,3560.61 2736.39,3560.61 v1(2739,3558) 2739.5,3558.5 2843,3558.5 INA1_INA8.4 ; R13.2 2617,6060.82 2570,6013.82 2570,5935.86 2610.86,5895 v1(2739,5895) 2739.5,5895.5 2843,5895.5 INA1_INA13.4 ; R14.2 2555,6535 2510,6490 2510,6410 2554,6366 2735.27,6366 v1(2737.13,6367.87) ; R15.2 2617,7004.82 2570,6957.82 2570,6900.86 2632.86,6838 v1(2739,6838) 2739.5,6838.5 2843,6838.5 INA1_INA15.4 ; v1@2737.13,6366 2737.63,6366.5 2843,6366.5 INA1_INA14.4 ; v1(2738.75,814) 2739.25,814.5 2842.74,814.5 INA1_INA2.4 ; v1(2739,379) 2739.5,379.5 2843,379.5 INA1_INA1.4 ; v1(2739,1253) 2739.5,1253.5 2843,1253.5 INA1_INA3.4 ; v1(2739,2175) 2739.5,2175.5 2843,2175.5 INA1_INA5.4 ; v1(2739,2636) 2739.5,2636.5 2843,2636.5 INA1_INA6.4 ; v1(2739,3097) 2739.5,3097.5 2843,3097.5 INA1_INA7.4 ; v1(2739,4019) 2739.5,4019.5 2843,4019.5 INA1_INA9.4 ; v1(2739,4480) 2739.5,4480.5 2843,4480.5 INA1_INA10.4 ; v1(2739,4952) 2739.5,4952.5 2843,4952.5 INA1_INA11.4 ; v1(2739,5423) 2739.5,5423.5 2843,5423.5 INA1_INA12.4 ; v1(2739,7309) 2739.5,7309.5 2843,7309.5 INA1_INA16.4
  Bottom Layer w10: P2.7 2616,814 v1(2738.75,814) ; v1(2545,5525) 2647,5423 v1(2739,5423) ; v1(2550,7420) 2661,7309 v1(2739,7309) v1(2739,6838) 2738.07,6837.07 2738.07,6368.8 v1@2739,6367.87 ; v1(2737.13,6367.87) v1@2739,6367.87 ; v1(2739,379) 2738.87,379.13 2738.87,813.87 v1(2738.75,814) ; v1(2738.75,814) 2738.87,814.13 2738.87,1252.87 v1(2739,1253) v1(2739,1714) v1(2739,2175) v1(2739,2636) v1(2739,3097) v1(2739,3558) v1(2739,4019) v1(2739,4480) v1(2739,4952) v1(2739,5423) ; v1(2739,5423) v1(2739,5895) v1@2739,6367.87
SDA: INA1_INA1.3 INA1_INA2.3 INA1_INA3.3 INA1_INA4.3 INA1_INA5.3 INA1_INA6.3 INA1_INA7.3 INA1_INA8.3 INA1_INA9.3 INA1_INA10.3 INA1_INA11.3 INA1_INA12.3 INA1_INA13.3 INA1_INA14.3 INA1_INA15.3 INA1_INA16.3 P2.8 R9.2 R10.2 R11.2 R12.2 R19.2 R23.2 R27.2 R31.2 | length 11298.3
  Top Layer w10: R19.2 2617,1358.82 2671.82,1304 v1(2779,1304) INA1_INA3.3 ; R9.2 2617,4184.82 2560,4127.82 2560,4090.86 2580.86,4070 v1(2779,4070) INA1_INA9.3 ; R10.2 2617,4644.82 2604.87,4632.69 2537.69,4632.69 2526.76,4621.76 2526.76,4548.24 2544,4531 v1(2779,4531) INA1_INA10.3 ; R11.2 R27.2 2617,5056.82 2670.82,5003 v1(2779,5003) INA1_INA11.3 ; R12.2 2551,5591 2515,5555 2515,5495 2536,5474 v1(2779,5474) INA1_INA12.3 ; R31.2 2617,6943.82 2671.82,6889 v1(2779,6889) INA1_INA15.3 ; R23.2 2657.94,3195.09 2657.94,3162.88 2672.82,3148 v1(2779,3148) INA1_INA7.3 ; v1(2778.75,865) INA1_INA2.3 ; v1(2779,430) INA1_INA1.3 ; v1(2779,1765) INA1_INA4.3 ; v1(2779,2226) INA1_INA5.3 ; v1(2779,2687) INA1_INA6.3 ; v1(2779,3609) INA1_INA8.3 ; v1(2779,5946) INA1_INA13.3 ; v1(2779,6417) INA1_INA14.3 ; v1(2779,7360) INA1_INA16.3
  Bottom Layer w10: P2.8 2374.02,984.02 2374.02,346.46 2437.01,283.46 2732.28,283.46 2779,330.18 v1(2779,430) 2779,707.75 2778.75,708 v1(2778.75,865) 2778.87,865.13 2778.87,1303.87 v1(2779,1304) v1(2779,1765) v1(2779,2226) v1(2779,2687) v1(2779,3148) v1(2779,3609) v1(2779,4070) v1(2779,4531) v1(2779,5003) v1(2779,5474) v1(2779,5946) v1(2779,6417) v1(2779,6889) v1(2779,7360)
pads on no net: P1.1 P1.2 P1.3 P1.4 P1.5 P1.6 P1.7 P1.8 P1.9 P1.10 P1.11 P1.12 P1.13 P1.14 P1.15 P2.1 P2.3 P2.4 P2.5 P2.6 P2.9 P2.10 P2.11 P2.12 P2.13 P2.15

## Polygon pours and split planes (outlines as drawn)
3V on Bottom Layer "NONET_L-01_P-001" (solid, pour order 2): 1787.4,7606.3 3933.07,7606.3 3937.01,7610.24 3937.01,244.09 1783.46,244.09
GNDArd on Top Layer "NONET_L-01_P-001" (solid, pour order 1): 3933.07,7610.24 3937.01,7606.3 3937.01,248.03 1783.46,245 1783.46,409.45 1783.46,7610.24

## Keep-outs
Keep-Out Layer:
  lines w10: 1783.46,245 1783.46,7610 3217.76,7610 3937.01,7610 3937.01,245 1783.46,245

## Silkscreen, mask and mechanical layers (free items; w line width, h text height)
Top Overlay:
  lines w10: 2125.98,326.77 2125.98,381.89 2161.42,381.89 2161.42,326.77 ; 2102.36,326.77 2188.98,326.77 2188.98,440.94 2102.36,440.94 2102.36,326.77
  text "OPTO_eic" at 1978.5,7504.75 h39.37
  text "+" at 3516.24,7498.19 h39.37 r90
  text "16CHDMINA219" at 1911.57,7443.07 h39.37
  text "16" at 3478.19,7391.89 h39.37 r90
  text "-" at 3513.62,7285.59 h39.37 r90
  text "INA219" at 2840.71,7234.41 h39.37
  text "+" at 3531.99,7021.81 h39.37 r90
  text "15" at 3490,6927.32 h39.37 r90
  text "-" at 3529.36,6809.21 h39.37 r90
  text "INA219" at 2844.65,6765.91 h39.37
  text "+" at 3516.24,6549.37 h39.37 r90
  text "14" at 3482.13,6447.01 h39.37 r90
  text "-" at 3513.62,6336.77 h39.37 r90
  text "INA219" at 2848.58,6289.53 h39.37
  text "+" at 3516.24,6080.87 h39.37 r90
  text "13" at 3490,5974.57 h39.37 r90
  text "-" at 3513.62,5868.27 h39.37 r90
  text "INA219" at 2856.46,5821.02 h39.37
  text "+" at 3520.18,5604.49 h39.37 r90
  text "12" at 3495,5488 h39.37 r90
  text "-" at 3517.55,5391.89 h39.37 r90
  text "INA219" at 2860.39,5344.65 h39.37
  text "+" at 3512.31,5135.98 h39.37 r90
  text "11" at 3490,5022 h39.37 r90
  text "IN-16" at 2376.14,4994.25 h39.37
  text "-" at 3509.68,4923.39 h39.37 r90
  text "IN+16" at 1809.21,4891.89 h39.37
  text "INA219" at 2860.53,4874.02 h39.37
  text "IN+15" at 1809.21,4789.53 h39.37
  text "IN-15" at 2376.14,4785.59 h39.37
  text "IN-14" at 2376.14,4687.17 h39.37
  text "+" at 3524.12,4659.61 h39.37 r90
  text "IN+14" at 1809.21,4592.68 h39.37
  text "10" at 3493,4544 h39.37 r90
  text "IN+13" at 1805.28,4494.25 h39.37
  text "IN-13" at 2380.08,4486.38 h39.37
  text "-" at 3521.49,4447.01 h39.37 r90
  text "INA219" at 2860.53,4404.79 h39.37
  text "IN-12" at 2384.02,4391.89 h39.37
  text "IN+12" at 1805.28,4289.53 h39.37
  text "+" at 3520.18,4198.98 h39.37 r90
  text "IN-11" at 1817.09,4191.1 h39.37
  text "IN+11" at 2376.14,4191.1 h39.37
  text "9" at 3493.94,4104.49 h39.37 r90
  text "IN-10" at 2376.14,4088.74 h39.37
  text "IN+10" at 1805.28,3990.32 h39.37
  text "-" at 3517.55,3986.38 h39.37 r90
  text "INA219" at 2860.39,3943.07 h39.37
  text "IN-9" at 1836.77,3891.89 h39.37
  text "IN+9" at 2372.2,3891.89 h39.37
  text "IN-8" at 2376.14,3785.59 h39.37
  text "+" at 3524.12,3738.35 h39.37 r90
  text "IN+8" at 1840.71,3691.1 h39.37
  text "8" at 3493,3637 h39.37 r90
  text "IN-7" at 1840.71,3592.68 h39.37
  text "IN+7" at 2372.2,3588.74 h39.37
  text "-" at 3521.49,3525.75 h39.37 r90
  text "IN-6" at 2372.2,3490.32 h39.37
  text "INA219" at 2868.27,3478.5 h39.37
  text "IN+6" at 1836.77,3395.83 h39.37
  text "IN-5" at 1836.77,3289.53 h39.37
  text "IN+5" at 2372.2,3281.65 h39.37
  text "+" at 3524.12,3277.72 h39.37 r90
  text "7" at 3498,3181 h39.37 r90
  text "IN-4" at 2372.2,3179.29 h39.37
  text "IN+4" at 1840.71,3092.68 h39.37
  text "-" at 3521.49,3065.12 h39.37 r90
  text "INA219" at 2868.27,3010 h39.37
  text "IN-3" at 1832.83,2990.32 h39.37
  text "IN+3" at 2372.2,2986.38 h39.37
  text "IN-2" at 2372.2,2887.95 h39.37
  text "+" at 3516.24,2817.09 h39.37 r90
  text "IN+2" at 1840.71,2793.46 h39.37
  text "6" at 3486,2717 h39.37 r90
  text "IN-1" at 1844.65,2683.23 h39.37
  text "IN+1" at 2376.14,2683.23 h39.37
  text "-" at 3513.62,2604.49 h39.37 r90
  text "INA219" at 2856.46,2553.31 h39.37
  text "+" at 3520.18,2360.39 h39.37 r90
  text "5" at 3486,2271 h39.37 r90
  text "-" at 3517.55,2147.8 h39.37 r90
  text "INA219" at 2856.46,2088.74 h39.37
  text "+" at 3520.18,1899.76 h39.37 r90
  text "4" at 3486,1797.4 h39.37 r90
  text "-" at 3517.55,1687.17 h39.37 r90
  text "INA219" at 2860.39,1632.05 h39.37
  text "+" at 3512.31,1435.2 h39.37 r90
  text "3" at 3486,1340.71 h39.37 r90
  text "-" at 3509.68,1222.6 h39.37 r90
  text "INA219" at 2860.39,1171.42 h39.37
  text "+" at 3512.31,998.19 h39.37 r90
  text "2" at 3486,899.76 h39.37 r90
  text "-" at 3509.68,785.59 h39.37 r90
  text "INA219" at 2860.39,730.47 h39.37
  text "+" at 3508.37,561.18 h39.37 r90
  text "1" at 3486,470.63 h39.37 r90
  text "-" at 3505.74,348.58 h39.37 r90
  text "INA219" at 2860.39,297.4 h39.37
  text "Arduino Nano" at 1935.2,261.97 h39.37

## Text inside footprints (layer, text, board x,y; h text height)
*1: Top Overlay "Ухо" at 2233.35,5360.68 h99.37 r180; Top Overlay "Ухо" at 2233.35,2325.25 h99.37 r180